# EAGLE board Esquema (EAGLE 9.6.2)
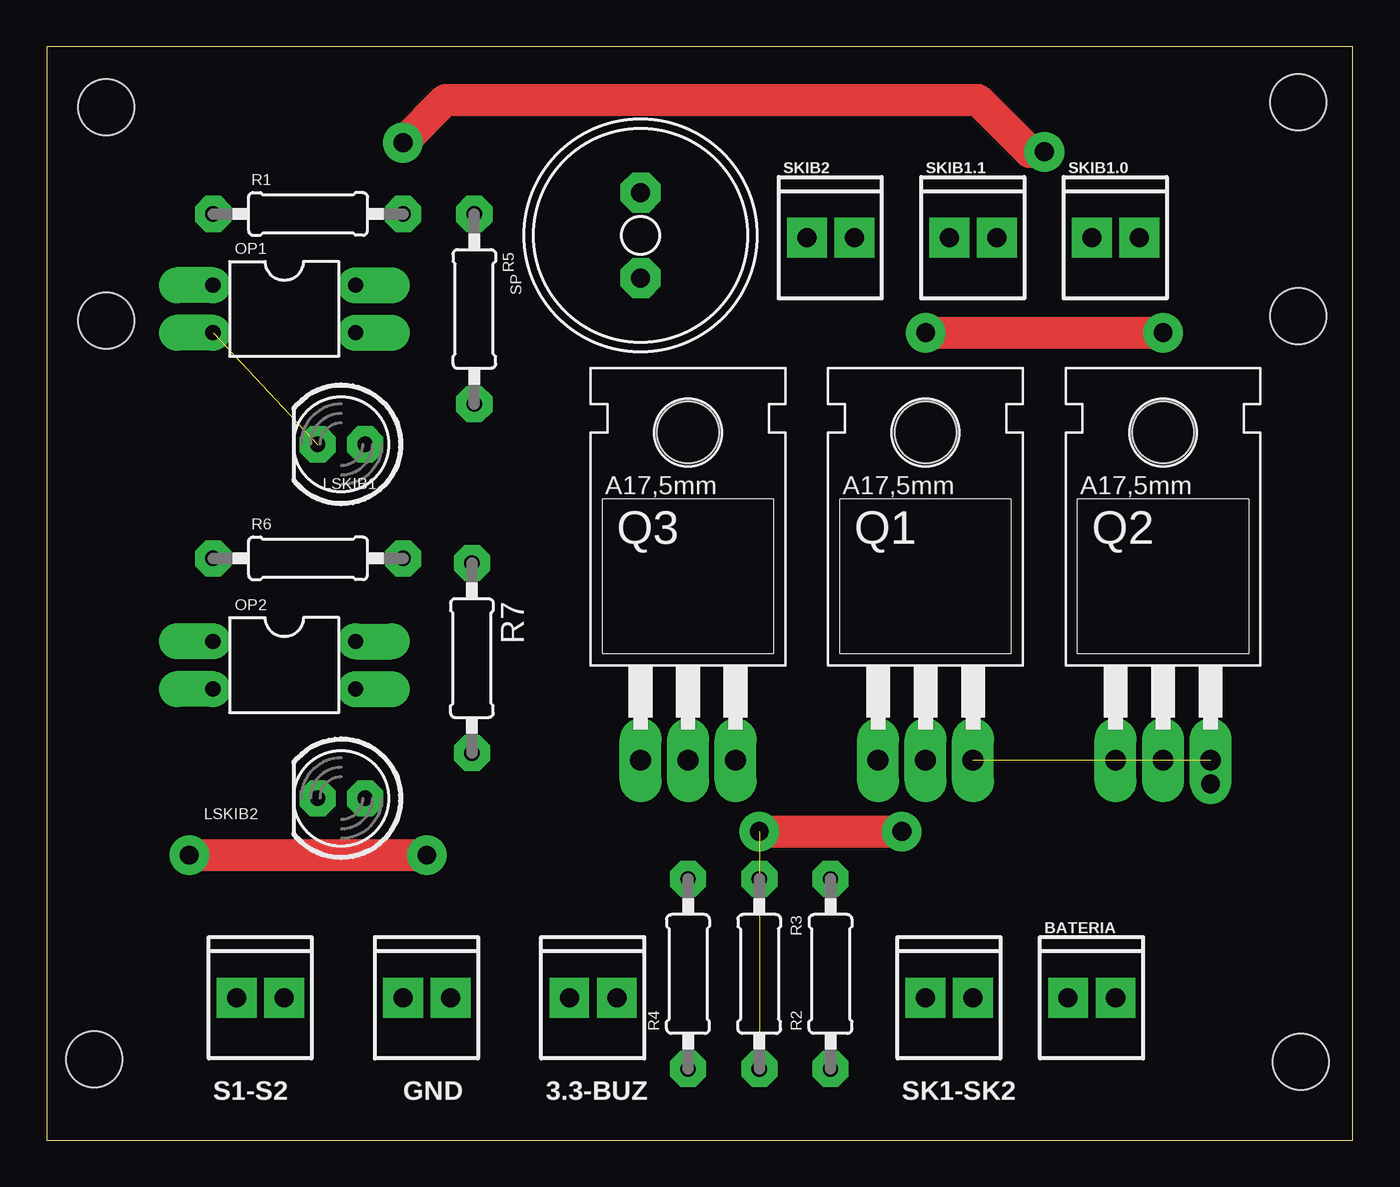
[diagram p0: board, top side]
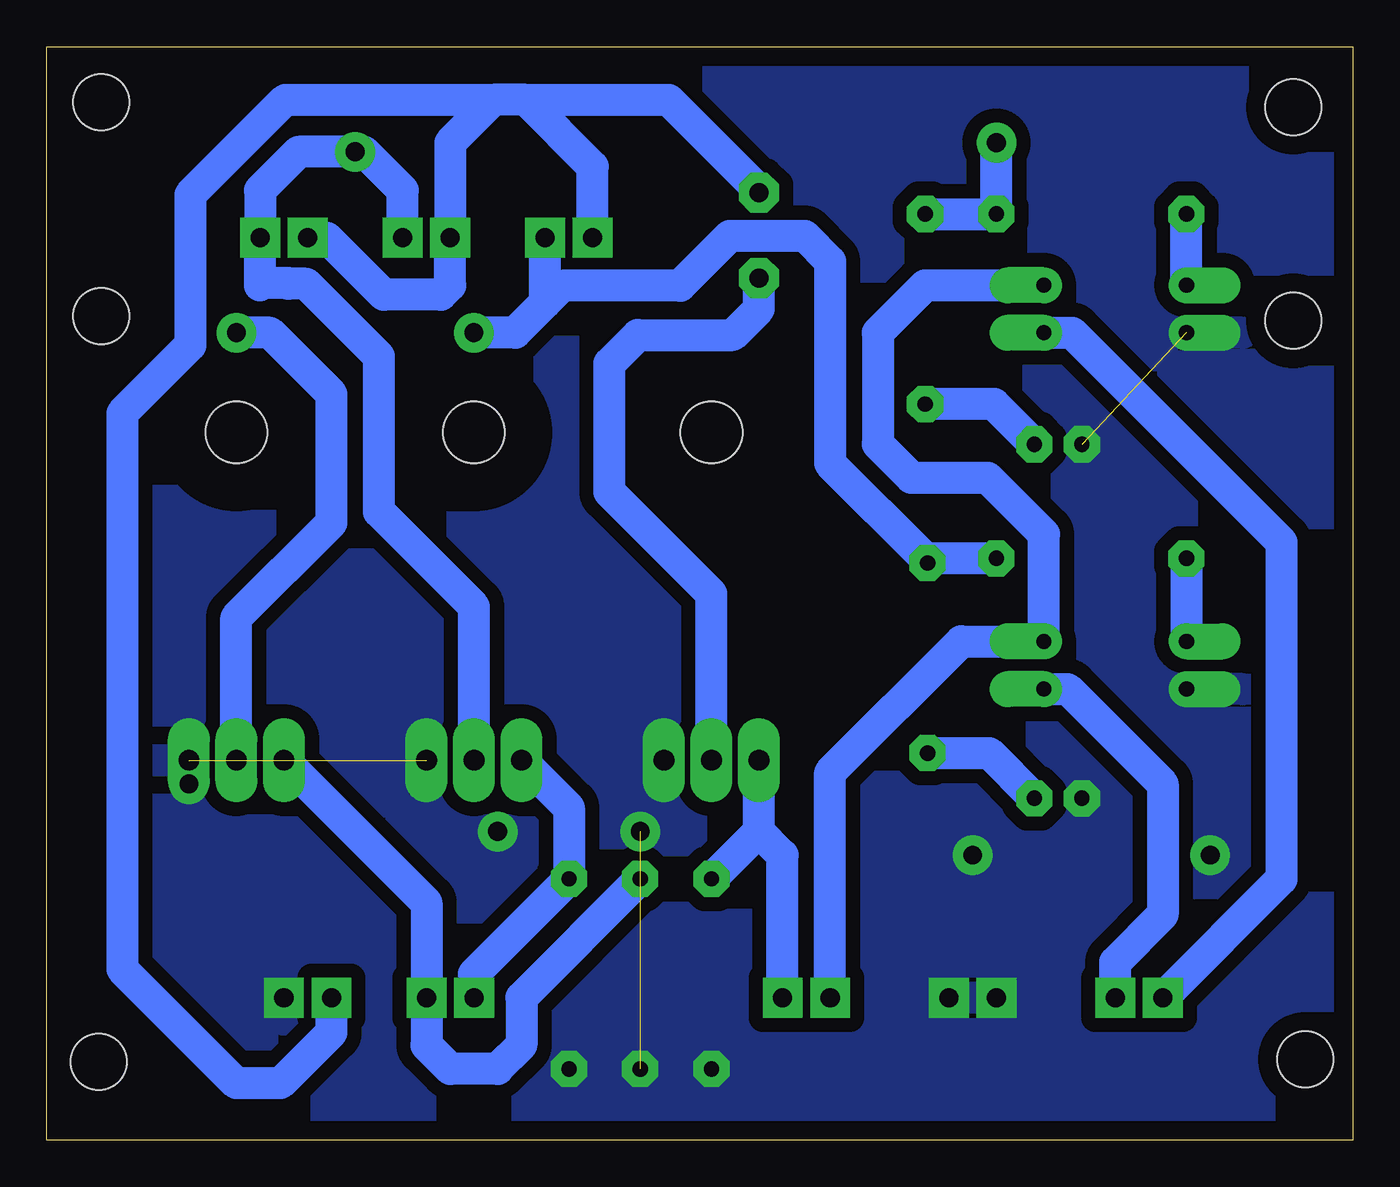
[diagram p1: board, bottom side, seen from below]

Size 69.83 x 58.47 mm. Coordinates in mm from the lower left corner, seen from the top.
Outline: 0,0 69.83,0 69.83,58.47 0,58.47 0,0
Copper layers (1*16): Top 0.035mm / dielectric 1.5mm / Bottom 0.035mm
Design rules "default": minimum track width 1.7mm, minimum drill 1mm, track to track 30mil, track to pad 20mil, pad to pad 6mil, via to via 6mil, smd to smd 6mil, copper to edge 40mil, drill to drill 6mil, minimum pad ring 22mil, minimum via ring 22mil, stop-mask expansion 4mil, vias tented up to drill 0mil, thermal gap 0mil
Holes 3 mm at 3.17,43.81 66.93,44.07 2.54,4.32 67.06,4.19 3.17,55.24 66.93,55.5

## Footprints (pad centres in the part's own frame; a part is rotated, then mirrored left to right if it is on the bottom)
1X02_2.54_SCREWTERM = drill 1.016 square: P1 2.54,0; P2 0,0
LED5MM = drill 0.813 octagon: A -1.27,0; K 1.27,0
DIL04 = drill 0.813 offset: 1 -1.27,-3.81; 2 1.27,-3.81; 3 1.27,3.81; 4 -1.27,3.81
TO220 = drill 1.118 long: 1 -2.54,-6.35; 2 0,-6.35; 3 2.54,-6.35 | hole 3.302: 0,11.176
0207/10 = drill 0.813 octagon: 1 -5.08,0; 2 5.08,0
AL11P = drill 1.016 pad 1.905 octagon: + 2.286,0; - -2.286,0

## Placement (x,y rotation side)
3.3-BUZ  [1X02_2.54_SCREWTERM]  27.94,7.62 0 top
BATERIA  [1X02_2.54_SCREWTERM]  54.61,7.62 0 top
GND  [1X02_2.54_SCREWTERM]  19.05,7.62 0 top
LSKIB1  5mm  [LED5MM]  15.75,37.21 180 top
LSKIB2  5mm  [LED5MM]  15.75,18.29 180 top
OP1  PC817  [DIL04]  12.7,44.45 270 top
OP2  PC817  [DIL04]  12.7,25.4 270 top
Q1  IRF540  [TO220]  46.99,26.67 0 top
Q2  IRF540  [TO220]  59.69,26.67 0 top
Q3  IRF540  [TO220]  34.29,26.67 0 top
R1  1k  [0207/10]  13.97,49.53 0 top
R2  1k  [0207/10]  41.91,8.89 90 top
R3  1k  [0207/10]  38.1,8.89 90 top
R4  1k  [0207/10]  34.29,8.89 90 top
R5  1k  [0207/10]  22.86,44.45 270 top
R6  1k  [0207/10]  13.97,31.11 0 top
R7  1k  [0207/10]  22.73,25.78 270 top
S1-S2  [1X02_2.54_SCREWTERM]  10.16,7.62 0 top
SK1-SK2  [1X02_2.54_SCREWTERM]  46.99,7.62 0 top
SKIB1.0  [1X02_2.54_SCREWTERM]  55.88,48.26 0 top
SKIB1.1  [1X02_2.54_SCREWTERM]  48.26,48.26 0 top
SKIB2  [1X02_2.54_SCREWTERM]  40.64,48.26 0 top
SP  AL11P  [AL11P]  31.75,48.39 90 top

## Library data of the parts
3.3-BUZ BATERIA GND S1-S2 SK1-SK2 SKIB1.0 SKIB1.1 SKIB2 = SparkFun-Connectors
LSKIB1 LSKIB2 = led
OP1 OP2 = optocoupler; MPN: PC817X4J000F; OC_FARNELL: 9707727; OC_NEWARK: 97K7059
Q1-Q3 = transistor-fet
R1-R7 = rcl; SPICEPREFIX: R
SP = buzzer; OC_FARNELL: unknown; OC_NEWARK: unknown

## Nets
3.3V: 3.3-BUZ.P2 OP1.4 OP2.4
BUZZER: 3.3-BUZ.P1 Q3.1 R4.2
GND: BATERIA.P1 GND.P1 GND.P2 LSKIB1.K LSKIB2.K OP1.2 OP2.2 Q1.3 Q2.3 Q3.3 R2.1 R3.1 R4.1
N$1: LSKIB2.A R7.2
N$2: Q3.2 SP.-
N$3: LSKIB1.A R5.2
N$4: OP1.1 R1.1
N$5: OP2.1 R6.1
SINAL_SKIB1: OP1.3 S1-S2.P2
SINAL_SKIB2: OP2.3 S1-S2.P1
SKIB1: Q1.1 R2.2 SK1-SK2.P2
SKIB1_CONECTOR: Q1.2 R1.2 R5.1 SKIB1.0.P1 SKIB1.1.P1
SKIB2: Q2.1 R3.2 SK1-SK2.P1
SKIB2_CONECTOR: Q2.2 R6.2 R7.1 SKIB2.P1
VCC: BATERIA.P2 SKIB1.0.P2 SKIB1.1.P2 SKIB2.P2 SP.+

## Tracks (layer width: path | path; a pad name or v marks a point on that pad's centre or on a via)
3.3V
  Bottom 1.7: OP1.4 22.86,45.72 25.4,43.18 25.4,37.23 23.6,35.43 19.53,35.43 16.51,32.41 OP2.4 20.93,26.67 27.94,19.66 3.3-BUZ.P2
BUZZER
  Bottom 1.7: 31.75,16.51 Q3.1 | 31.75,16.51 30.48,15.24 3.3-BUZ.P1 | R4.2 31.75,16.51
GND  (via drill 1)  (3 unrouted)
  Top 1.7: v38.1,16.51 v45.72,16.51 | v20.32,15.24 v7.62,15.24
  other vias: 62.23,19.05
  pour Bottom: 0.38,58.04 0.38,0.38 69.47,0.38 69.47,58.04
N$1
  Bottom 1.7: R7.2 19.43,20.7 LSKIB2.A
N$2
  Bottom 1.7: Q3.2 34.29,29.21 39.75,34.67 39.75,41.53 38.23,43.05 33.15,43.05 31.75,44.45 SP.-
N$3
  Bottom 1.7: LSKIB1.A 19.18,39.37 R5.2
N$4
  Bottom 1.7: OP1.1 R1.1
N$5
  Bottom 1.7: R6.1 OP2.1
SINAL_SKIB1
  Bottom 1.7: OP1.3 15.01,43.18 3.81,31.98 3.81,13.97 S1-S2.P2
SINAL_SKIB2
  Bottom 1.7: OP2.3 15.24,24.13 10.16,19.05 10.16,12.06 12.7,9.53 S1-S2.P1
SKIB1
  Bottom 1.7: SK1-SK2.P2 46.99,8.89 R2.2 41.91,17.78 Q1.1
SKIB1_CONECTOR  (via drill 1)
  Top 1.7: v19.05,53.34 21.34,55.63 49.78,55.63 52.55,52.86 v53.34,52.86
  Bottom 1.7: Q1.2 46.99,28.54 52.07,33.62 52.07,41.91 55.96,45.8 56.9,45.8 56.94,45.84 58.3,45.84 58.42,45.72 SKIB1.0.P1 58.42,50.8 56.36,52.86 v53.34,52.86 52.86,52.86 50.8,50.8 SKIB1.1.P1 | R5.1 R1.2 v19.05,53.34
SKIB2
  Bottom 1.7: Q2.1 49.53,12.7 SK1-SK2.P1 49.53,5.08 48.26,3.81 45.72,3.81 44.45,5.08 44.45,7.62 R3.2
SKIB2_CONECTOR  (via drill 1)
  Top 1.7: v46.99,43.18 v59.69,43.18
  Bottom 1.7: Q2.2 59.69,27.94 54.61,33.02 54.61,39.83 | 43.18,44.78 SKIB2.P1 | R7.1 22.48,31.11 R6.2 22.86,31.11 27.94,36.2 27.94,46.99 29.31,48.36 33.3,48.36 35.97,45.7 42.27,45.7 43.18,44.78 | 43.18,44.78 44.78,43.18 v46.99,43.18 | 54.61,39.83 54.65,39.86 54.65,39.93 | v59.69,43.18 57.9,43.18 54.61,39.9 54.61,39.83
VCC
  Bottom 1.7: SKIB2.P2 40.64,52.07 44.2,55.63 | 44.2,55.63 45.97,55.63 | 45.97,55.63 48.26,53.34 SKIB1.1.P2 48.26,45.72 48.77,45.21 51.81,45.21 54.85,48.26 SKIB1.0.P2 | 44.2,55.63 36.58,55.63 31.75,50.8 SP.+ | BATERIA.P2 54.61,5.76 57.33,3.05 59.69,3.05 65.79,9.14 65.79,38.88 62.15,42.51 62.15,50.55 57.08,55.63 45.97,55.63